# Altium PCB USBasp.PcbDoc
Units mm, origin at the board's own origin, x right, y up, seen from the top; angles counter-clockwise.
Board outline 61 x 30.6 mm, 2 copper layers (Top Layer, Bottom Layer), stack 1.671 mm thick; 34 components, 31 nets, 121 pads, 41 vias.
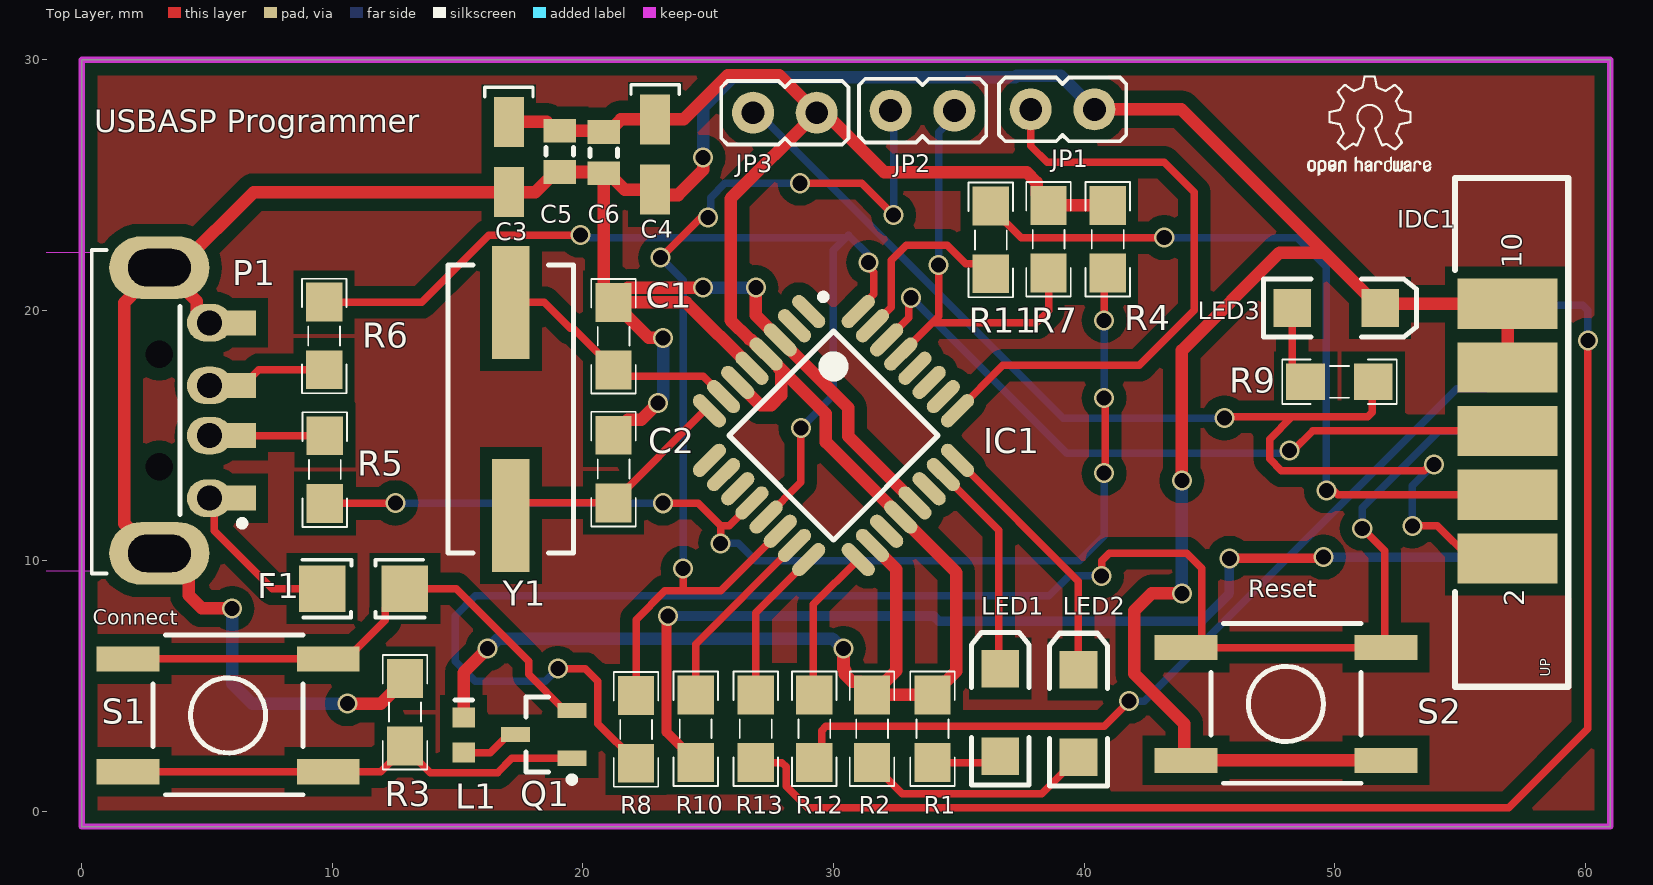
[diagram p0: Top Layer view]
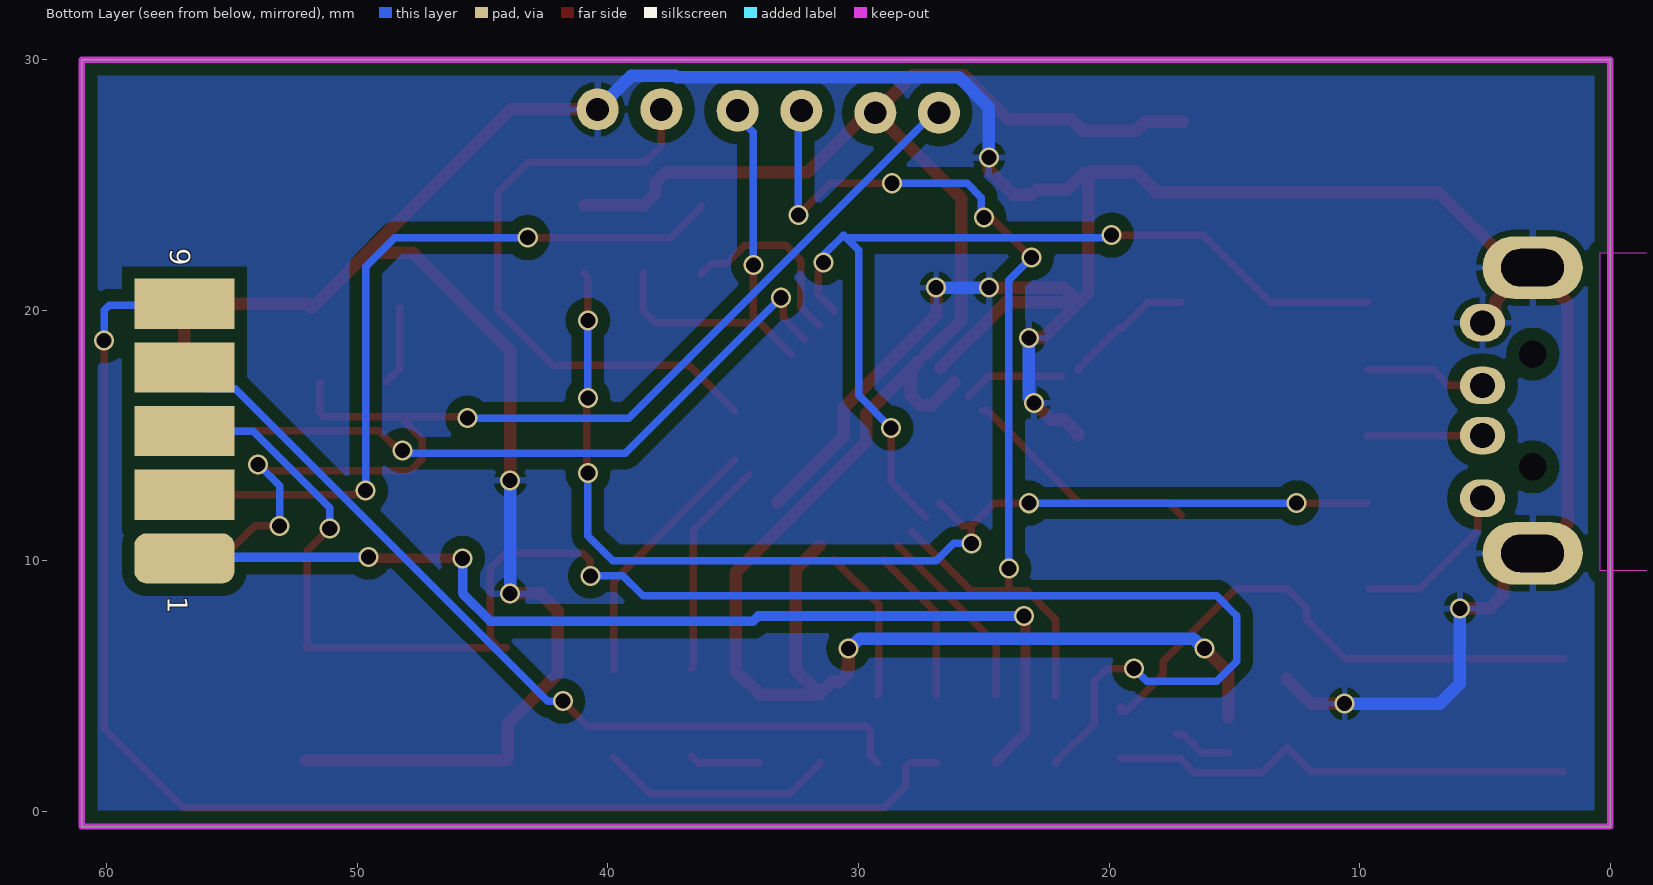
[diagram p1: Bottom Layer view, seen from below]
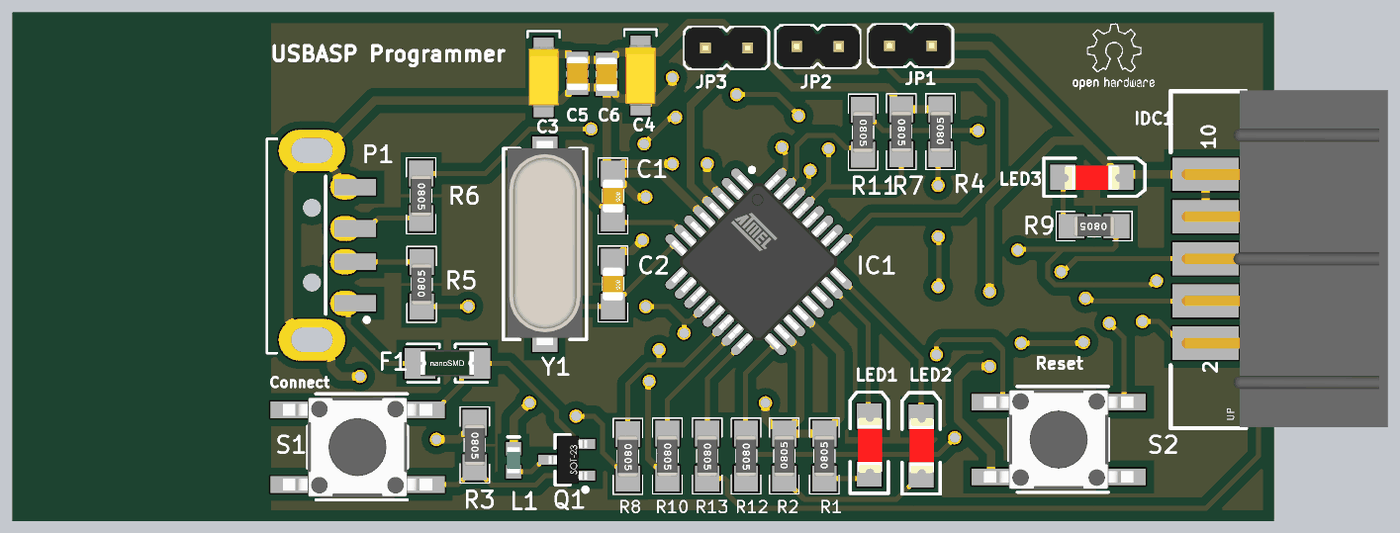
[diagram p2: 3D render of the assembled board from above, using the file's embedded part models]

## Layer stack, top to bottom
Top Solder: solder mask 0.0102, Solder Resist, Dk 3.5
Top Layer: signal copper 0.0356
Dielectric 1: dielectric 1.6, FR-4, Dk 4.8
Bottom Layer: signal copper 0.0356
Bottom Solder: solder mask 0.0102, Solder Resist, Dk 3.5

## Board outline
0,-0.6 61,-0.6 61,30 0,30

## Design rules (kind name [scope] priority, off if disabled: settings)
Clearance Clearance_Polygon [InPolygon] p1: gap=0.5 ignorepadtopadclearanceinfootprint=FALSE
Clearance [All] p2: gap=0.25 ignorepadtopadclearanceinfootprint=FALSE
HoleSize [All] p1: absolutevalues=TRUE maxlimit=5 minlimit=0.1 maxpercent=80.000 minpercent=20.000
HoleToHoleClearance [All] p1: gap=0.2 allowstackedmicrovias=TRUE
MinimumSolderMaskSliver [All] p1: minsoldermaskwidth=0.1
PolygonConnect [All] p1: connectstyle=Relief reliefconductorwidth=0.254 reliefentries=4 polygonreliefangle="90 Angle" airgapwidth=0.254
RoutingVias [All] p1: holewidth=0.6 width=0.8 viastyle="Through Hole" minholewidth=0.5 minwidth=0.7 maxholewidth=1 maxwidth=2
SilkToSilkClearance [All] p1: silktosilkclearance=0.1
SilkToSolderMaskClearance [IsPad] p1: minsilkscreentomaskgap=0.1 clearancetoexposedcopper=TRUE
SolderMaskExpansion [All] p1: expansion=0.102 istentingtop=FALSE
Width [All] p1: maxlimit=1 minlimit=0.25 preferedwidth=0.3
25 further rules are at their usual default settings.

## Components (designator, comment, footprint, x,y, rotation, side; value= is the part's Value field where it differs from the comment)
C1 "22pF" CAPC3413X12N 21.225,18.962 r270 top
C2 "22pF" CAPC3413X12N 21.225,13.662 r270 top
C3 "10uF" "CAPP 1206 (3216X18L) Size A" 17.048,27.517 r270 top
C4 "10uF" "CAPP 1206 (3216X18L) Size A" 22.882,27.617 r270 top
C5 "100nF" SMD_CAP_0805 19.082,27.167 r270 top
C6 "100nF" SMD_CAP_0805 20.84,27.117 r270 top
F1 "250mA" "1206 FUSE" 11.246,8.89 r0 top
IC1 "IC_MCU_ATmega8A_SMD" 32A_N 30,15 r315 top
IDC1 "CONNECTOR_IDC_5X2" "IDC2.54-10PIN - CROSS" 56.9,15.18 r90 top
JP1 "Jumper" JP254_V 39.141,28.016 r180 top
JP2 "Jumper" JP254_V 33.553,27.965 r0 top
JP3 "Jumper" JP254_V 28.062,27.882 r180 top
L1 "Inductor" INDC1608L 15.24,3.048 r270 top value=10uH
LED1 "1206" "LED SMD 1206" 36.652,3.95 r90 top
LED2 "Red" "LED SMD 1206" 39.776,3.912 r90 top
LED3 "Red" "LED SMD 1206" 50.061,20.091 r0 top
P1 "USB Connector" "USB A TYPE RIGHT ANGLE" 0.4,16 r180 top (schematic designator p1)
Q1 "BC807" SOT23_BEC_N 18.438,3.073 r180 top
R1 "270" RESC3413X04N 33.953,3.299 r90 top
R2 "270" RESC3413X04N 31.54,3.299 r90 top
R3 "4K7" RESC3413X04N 12.903,3.962 r270 top
R4 "2K" RESC3413X04N 40.945,22.835 r90 top
R5 "100" RESC3413X04N 9.703,13.64 r90 top
R6 "100" RESC3413X04N 9.677,18.974 r270 top
R7 "10K" RESC3413X04N 38.583,22.835 r270 top
R8 "270" RESC3413X04N 24.502,3.301 r270 top
R9 "270" RESC3413X04N 50.19,17.145 r180 top
R10 "270" RESC3413X04N 22.123,3.277 r270 top
R11 "270" RESC3413X04N 36.278,22.809 r270 top
R12 "270" RESC3413X04N 29.235,3.301 r270 top
R13 "270" RESC3413X04N 26.899,3.301 r270 top
S1 "Switch PB" SW-PB 5.842,3.835 r180 top
S2 "Switch PB" SW-PB 48.057,4.293 r180 top
Y1 "12 MHz" "CRYSTAL SMD" 17.125,16.062 r270 top

## Footprints (in the part's own frame and the unit in brackets; to place one, negate y for a bottom-side part, rotate by r counter-clockwise, add the part's x,y. Pads: shape width x height; smd on the part's side, far side on the other; paste and mask are expansions set on the pad)
32A_N [mm] "Thin QFP, 32-Leads, Body 7x7mm, Pitch 0.8mm, IPC Medium Density"
  oval 1.65x0.55 smd mask+0.06: 1(-4.2,2.8) 2(-4.2,2) 3(-4.2,1.2) 4(-4.2,0.4) 5(-4.2,-0.4) 6(-4.2,-1.2) 7(-4.2,-2) 8(-4.2,-2.8) 17(4.2,-2.8) 18(4.2,-2) 19(4.2,-1.2) 20(4.2,-0.4) 21(4.2,0.4) 22(4.2,1.2) 23(4.2,2) 24(4.2,2.8)
  oval 0.55x1.65 smd mask+0.06: 9(-2.8,-4.2) 10(-2,-4.2) 11(-1.2,-4.2) 12(-0.4,-4.2) 13(0.4,-4.2) 14(1.2,-4.2) 15(2,-4.2) 16(2.8,-4.2) 25(2.8,4.2) 26(2,4.2) 27(1.2,4.2) 28(0.4,4.2) 29(-0.4,4.2) 30(-1.2,4.2) 31(-2,4.2) 32(-2.8,4.2)
  silkscreen extent -4.32,-2.95 2.95,3.75, body extent -4.51,-4.51 4.51,4.51, height 1.15
"1206 FUSE" [mm] "Fast Acting Smd 1206 non-Resettable Fuse Chip For Pcb Board-Design:Abbas Basereh"
  rect 1.85x1.85 smd: 1(-1.65,0) 2(1.65,0)
  silkscreen extent -2.43,-1.15 2.43,1.15, body extent -1.6,-0.8 1.6,0.8, height 1
CAPC3413X12N [mm] "Chip Capacitor, 2-Leads, Body 3/40x1/30mm, IPC Medium Density-Design:Abbas Basereh"
  rect 1.55x1.45 smd: 1(-1.35,0) 2(1.35,0)
  silkscreen extent -2.29,-0.89 2.29,0.89, body extent -1,-0.62 1,0.63, height 0.78
"CAPP 1206 (3216X18L) Size A" [mm] "Chip Capacitor, 2-Leads, Body 3.2x1.6mm, IPC High Density, chip Tantalum"
  rect 1.999x1.199 smd: 1(0,0) 2(2.8,0)
  silkscreen extent -1.38,-0.97 -0.99,0.97, body extent -0.43,-0.9 3.21,0.9, height 1.8
"CRYSTAL SMD" [mm] "DESIGNER ABBAS BASEREH"
  rect 4.5x1.5 smd: 1(-4.25,0) 2(4.25,0)
  silkscreen extent -5.75,-2.5 5.75,2.5, body extent -6.21,-2.25 6.09,2.25, height 5.18
"IDC2.54-10PIN - CROSS" [mm] "Connector; IDC, Low Profile Male Header, Thru-Hole; 10 Position; Vertical; Pitch 2.54 mm; 20.32 x 9.2 x 9.45 mm (LxWxH) DESIGNER : ABBAS BASEREH"
  rrect50% 2x4 smd far side: 1(-5.08,0)
  rect 2x4 smd: 2(-5.08,0) 4(-2.54,0) 6(0,0) 8(2.54,0) 10(5.08,0)
  rect 2x4 smd far side: 3(-2.54,0) 5(0,0) 7(2.54,0) 9(5.08,0)
  silkscreen extent -10.2,-2.42 10.1,2.1, body extent -10.15,-10.97 10.15,1.43, height 4.27
INDC1608L [mm] "Chip Inductor, Body 1.6x0.8mm, IPC High Density"
  rect 0.8x0.9 smd: 1(-0.7,0) 2(0.7,0)
  silkscreen extent -1.4,-0.35 -1.4,0.35, body extent -0.8,-0.4 0.8,0.4, height 0.95
JP254_V [mil] "Jumper Header 2.54mm Pitch, Vertical"
  round 66 hole 36: 1(50,0) 2(-50,0)
  silkscreen extent -100,-50 100,50, body extent -96,-49 100,49, height 323
"LED SMD 1206" [mm]
  rect 1.5x1.5 smd: 1(-1.75,0) 2(1.75,0)
  silkscreen extent -2.9,-1.15 3.2,1.15, body extent -1.65,-0.76 1.65,0.69, height 1.36
RESC3413X04N [mm] "Chip Resistor, 2-Leads, Body 3/40x1/30mm, IPC Medium Density-Design:Abbas Basereh"
  rect 1.55x1.45 smd: 1(-1.35,0) 2(1.35,0)
  silkscreen extent -2.29,-0.89 2.29,0.89, body extent -1.25,-0.62 1.25,0.62, height 0.79
SMD_CAP_0805 [mm]
  rect 0.95x1.3 smd: 1(0,0) 2(1.65,0)
  silkscreen extent 0.67,-0.55 0.97,0.55, body extent -0.19,-0.63 1.84,0.63, height 0.65
SOT23_BEC_N [mm] "SOT23, 3-Leads, Body 2.9x1.3mm, Pitch 0.95mm, Lead Span 2.4mm, IPC Medium Density"
  rect 1.15x0.6 smd: 1(-1.125,0.95) 2(-1.125,-0.95) 3(1.125,0)
  silkscreen extent -1.25,-1.5 0.7,1.92, body extent -1.23,-1.45 1.07,1.45, height 1
SW-PB [mm]
  rect 2.5x1 smd: 1(-3.992,2.25) 1(3.992,2.25) 2(-3.992,-2.25) 2(3.992,-2.25)
  silkscreen extent -3,-3.2 3,3.18, body extent -4.5,-3 4.5,3, height 5
"USB A TYPE RIGHT ANGLE" [mm] "Connector; USB1.1, Type A, SM; 4 Position; Right Angle DESIGNER ABBAS BASEREH"
  rect 2.5x1 smd: 1(-5.3,3.5) 2(-5.3,1) 3(-5.3,-1) 4(-5.3,-3.5)
  oval 1.8x1.5 hole 1: 1(-4.7,3.5) 2(-4.7,1) 3(-4.7,-1) 4(-4.7,-3.5)
  oval 4x2.5 hole 1.5 slot 2.5 at 0 deg: 5(-2.7,-5.7) 6(-2.7,5.7)
  round 0.8 hole 1.1 unplated: MH1(-2.7,-2.25) MH2(-2.7,2.25)
  Keep-Out Layer board cut-out: 0,6.4 0,-6.3 15.3,-6.3 15.3,6.4
  silkscreen extent -6.13,-6.4 0,6.5, body extent -4.9,-6.3 15.1,6.3, height 3.45

## Part data
C1 C2: library part "CAP SMD 0805", "CAP 0805", Data=16-12-2016, Desc.="CAP SMD 0805", Designer="Abbas Basereh"
C3 C4: library part Cap-Polar, "Polar Capacitor", Voltage=16V, Adding Date=1387/12/20, Designer="Saeid Jorablo", Organazation=ControTec
C5 C6: library part Cap-Bipolar, "Bipolar Capacitor", Voltage=100V, Adding Date=1387/12/20, Designer="Saeid Jorablo", Organazation=ControTec
F1: library part "Fuse SMD1206", "SMD Fuses 1206", Data=16-12-2016, Desc.="SMD Fuses 1206", Designer="Abbas Basereh"
IC1: "8-bit AVR Microcontroller, 8KB Flash, 512 Bytes EEPROM, 1KB SRAM, 32-pin TQFP, Industrial Grade (-40°C to 85°C)", Supplier Part Number 1=ATMEGA8A-AU-ND, Voltage=(V), Category=IC_MCU, Code_JEDEC=MS-026-ABA, Company="SJ Libraries", ComponentLink1Description=Datasheet, ComponentLink1URL=http://www.alldatasheet.com/view.jsp?Searchword=, ComponentLink2Description=Reference, DatasheetVersion="revC, Jul-2009", Designer="Eng. Saeid Jorablo", HelpURL=http://s3.picofile.com/file/7443264187/Coming_Soon_logo.gif, Mounting Technology="Surface Mount\Through-Hole", PackageDescription="32-Lead, 7x7x1.0 mm Body, 0.8mm Lead Pitch, Thin Profile Plastic Quad Flat Package (TQFP)", PackageReference=32A, Published=1-Apr-2010, Publisher="Saeid UnLimited", Supplier 1=Digi-Key, Supplier 2=Farnell, Supplier 3=Mouser, Supplier Part Number 2=1748532, Supplier Part Number 3=556-ATMEGA8A-AU, TYPE=IC
IDC1: library part "IDC_5X2 HEADER", "Header, 5-Pin, Dual row", Manufacturer=CHINA, Max Current=mA, Category=Connector, ComponentLink1Description=Datasheet, ComponentLink2Description=Reference, Connector type="IDC5X2  PROGPIN", Designer="ABBAS BASEREH", LatestRevisionDate=1395-11-17, Mounting Technology=Through-Hole, Pin Count=10, Publisher="ABBAS BASEREH", Status=Unreleased, Update=2017-2-4
JP1 JP2 JP3: library part JP, "Jumper Component", Category=Jumpers, Company="SJ Libraries", ComponentLink1Description=Datasheet, ComponentLink2Description=Reference, Designer="Eng. Saeid Jorablo", HelpURL=http://s3.picofile.com/file/7443264187/Coming_Soon_logo.gif, Mounting Technology="Surface Mount\Through-Hole", Pin Count=2, Publisher="SJ Unlimited", Status=Unreleased
LED1: library part LED, "LED", Color=Red, Adding Date=1387/12/22, Designer="Saeid Jorablo", Organazation=ControTec, Size="SMD 1206"
LED2 LED3: library part LED, "LED", Adding Date=1387/12/22, Color=Red, Designer="Saeid Jorablo", Organazation=ControTec, Size="SMD 1206"
P1: library part "USB A CONNECTOR", "USB Connector-A Type", Max Current=600mA, Category=Connector, ComponentLink1Description=Datasheet, ComponentLink2Description=Reference, Designer="ABBAS BASEREH", Mounting Technology="Surface Mount\Through-Hole", Pin Count=4-6, Publisher="ABBAS BASEREH", Status=Unreleased, Update=1395-11-17
Q1: library part PNP, "PNP Bipolar Transistor", LatestRevisionDate=29-May-2009, LatestRevisionNote="IPC-7351 Footprint Added.", PackageDescription="3-Pin SOT-23 Package 0.95 mm Pitch, 2.4 mm Lead Span", PackageReference=SOT-23B, PackageVersion=Aug-1999, Published=8-Jun-2000, Publisher="Altium Limited"
R1 R2 R3 R4 R5 R6 R7 R8 R9 R10 R11 R12 R13: library part "RES 0805 0.125W", "RES 0805", Data=16-12-2016, Desc.="RES SMD 0805", Designer="Abbas Basereh"
S1 S2: "Push Button Switch"
Y1: library part XTAL_Crystal, "XTAL Crystal", ComponentLink1Description=Datasheet, ComponentLink2Description=Reference, Design Date=2017-1-3, Designer="ABBAS BASEREH", Mounting Technology="Surface Mount\Through-Hole", Status=Unreleased
L1: Code_IEC=1005, Code_JEITA=0402, LatestRevisionDate=29-May-2009, LatestRevisionNote="IPC-7351 Footprint Added.", PackageDescription="Chip Inductor", PackageReference=0402-A, Published=8-Jun-2000, Publisher="Altium Limited"

## Via types
v1: diameter 0.8, hole 0.6, Top Layer to Bottom Layer, 41 vias

## Nets (pads, with @x,y where several pads share a name; then routed paths per layer and width w, separated by ;. In a path a pad name is that pad's centre, name@x,y a point inside that pad or via, vN(x,y) a via of type N, cw(c..) or ccw(c..) an arc to the next point about the centre after c; other vN are vias at no path point)
+5: C3.1 C4.1 C5.1 C6.1 IC1.4 IC1.6 IC1.18 IC1.20 JP3.2 L1.1 R1.2 R2.2 R4.2 R7.1 | length 88.5
  Top Layer w0.5: L1.1 15.24,5.54 v1(16.2,6.5) ; C3.1 18.557,27.517 18.907,27.167 C5.1 21.065,27.167 21.515,27.617 C4.1 24.017,27.617 25.773,29.373 27.841,29.373 JP3.2 JP3.2@29.3,27.851 ; IC1.6 27.094,16.209 27.509,16.209 27.911,16.611 27.911,17.587 IC1.4@27.811,17.687 ; IC1.4 27.299,18.253 26.886,18.667 26.864,18.667 26.679,18.851 26.647,18.851 25.9,19.598 25.9,24.451 JP3.2@29.3,27.851 ; IC1.4@27.63,17.936 29.7,15.866 29.7,14.734 IC1.20 34.9,9.534 34.9,5.596 34.478,5.174 34.428,5.174 33.953,4.699 R1.2 R2.2 R2.2@31.54,4.699 ; v1(30.4,6.5) 30.4,5.694 30.46,5.634 30.46,5.466 30.753,5.174 31.065,5.174 R2.2@31.54,4.699 ; IC1.18 32.5,9.672 32.5,5.609 32.065,5.174 32.015,5.174 R2.2@31.54,4.699 ; R4.2 R7.1 38.108,24.66 38.108,25.107 37.715,25.5 32.031,25.5 29.681,27.851 JP3.2@29.3,27.851
  Bottom Layer w0.5: v1(16.2,6.5) 16.243,6.5 16.643,6.9 29.957,6.9 30.357,6.5 v1(30.4,6.5)
GND: C1.1 C2.1 C3.2 C4.2 C5.2 C6.2 IC1.3 IC1.5 IC1.21 IDC1.8 IDC1.10 JP1.2 LED3.2 P1.4 P1.5 P1.6 R3.1 S2.1 | length 167.6
  Top Layer w0.5: P1.4@5.7,19.5 5.1,19.5 4.95,19.5 4.6,19.85 4.6,20.355 P1.5@3.255,21.7 ; v1(6,8.1) 4.8,8.1 4.271,8.629 4.271,9.284 3.255,10.3 P1.6 2.891,10.3 1.7,11.491 1.7,20.3 1.967,20.567 1.967,20.776 2.891,21.7 P1.5@3.255,21.7 ; v1(10.6,4.3) 11.941,4.3 12.903,5.262 R3.1 ; C2.1 21.225,15.062 21.8,15.637 22.337,15.637 v1(23,16.3) ; v1(23.2,18.9) 22.637,18.9 20.84,20.698 C6.2 ; v1(24.8,20.9) 21.8,20.9 21.225,20.325 C1.1 24.122,20.312 IC1.5 ; v1(24.8,26.1) 24.8,25.6 23.8,24.6 23.1,24.6 C4.2 21.664,24.817 21.015,25.467 C6.2 ; v1(26.9,20.9) 26.9,19.8 27.879,18.821 IC1.3 30.583,16.114 30.583,14.983 IC1.21 ; JP1.2 43.886,28.016 49.602,22.3 ; v1(43.9,8.7) 42.7,8.7 42,8 42,5.5 44,3.5 44,2.107 44.064,2.043 S2.1@52.049,2.043 ; v1(43.9,13.2) 43.9,18.4 47.8,22.3 49.602,22.3 ; IDC1.8 IDC1.10 51.979,20.26 LED3.2 49.602,22.3 ; P1.5@3.255,21.7 3.85,21.7 6.867,24.717 C3.2 18.108,24.717 18.907,25.517 C5.2 20.79,25.517 C6.2
  Bottom Layer w0.5: v1(6,8.1) 6,5.1 6.8,4.3 v1(10.6,4.3) ; v1(23,16.3) 23.2,16.5 v1(23.2,18.9) ; v1(24.8,20.9) v1(26.9,20.9) ; v1(24.8,26.1) 24.8,28.1 26,29.3 31.726,29.3 31.729,29.304 32.838,29.304 32.841,29.3 34.266,29.3 34.269,29.304 35.378,29.304 35.381,29.3 37.263,29.3 37.317,29.354 39.073,29.354 JP1.2 ; v1(43.9,8.7) 43.9,9.8 ; 43.9,9.8 v1(43.9,13.2)
NetF1_1: F1.1 P1.1 | length 6.7
  Top Layer w0.3: P1.1@5.7,12.5 5.65,12.5 5.3,12.15 5.3,11.2 7.61,8.89 F1.1
NetF1_2: F1.2 Q1.2 S1.2 | length 21.7
  Top Layer w0.3: S1.2@1.85,6.085 9.834,6.085 10.584,6.085 12.121,7.622 12.121,8.115 F1.2 14.941,8.89 17.835,5.997 17.835,5.477 19.288,4.023 Q1.2 19.563,4.111 Q1.2@19.5,4.173
NetIC1_23: IC1.23 LED1.2 | length 8.7
  Top Layer w0.3: IC1.23 36.6,11.228 36.6,5.753 LED1.2
NetIC1_24: IC1.24 LED2.2 | length 10.3
  Top Layer w0.3: IC1.24 39.776,9.183 LED2.2
NetIC1_25: IC1.25 JP1.1 | length 24.6
  Top Layer w0.3: IC1.25 36.76,17.8 42.2,17.8 44.4,20 44.4,24.7 43.2,25.9 38.527,25.9 37.871,26.555 JP1.1
NetIDC1_1: IDC1.1 R8.2 | length 41.8
  Top Layer w0.381: v1(23.4,7.8) 23.336,7.736 23.336,3.167 24.502,2.001 R8.2 ; v1(45.8,10.1) 49.5,10.1 v1(49.55,10.15)
  Bottom Layer w0.381: v1(23.4,7.8) 33.997,7.8 34.207,7.59 44.69,7.59 45.8,8.7 v1(45.8,10.1) ; v1(49.55,10.15) 56.85,10.15 IDC1.1
NetIDC1_2: IDC1.2 JP3.1 R9.1 | length 47.1
  Top Layer w0.3: v1(45.6,15.7) 45.646,15.746 48.296,15.746 ; R9.1@51.459,17.105 51.5,17.064 51.5,15.926 51.324,15.75 48.907,15.75 48.903,15.746 48.296,15.746 ; v1(53.1,11.4) 54.1,11.4 55.4,10.1 IDC1.2 ; v1(53.955,13.845) 53.819,13.845 53.574,13.6 47.869,13.6 47.4,14.069 47.4,14.85 48.296,15.746
  Bottom Layer w0.3: JP3.1 26.986,27.882 39.169,15.7 v1(45.6,15.7) ; v1(53.1,11.4) 53.1,12.991 v1(53.955,13.845)
NetIDC1_4: IDC1.4 R11.1 | length 30.7
  Top Layer w0.3: R11.1 36.278,24.109 37.488,22.9 v1(43.2,22.9) ; v1(49.669,12.8) 49.958,12.8 50.118,12.64 IDC1.4
  Bottom Layer w0.3: v1(43.2,22.9) 48.5,22.9 49.669,21.731 v1(49.669,12.8)
NetIDC1_5: IDC1.5 R10.2 S2.2 | length 67.9
  Top Layer w0.3: v1(19,5.7) 20.1,5.7 20.6,5.2 20.6,3.5 22.123,1.977 R10.2 ; v1(40.7,9.4) v1(40.7,9.4) 40.701,10.001 41,10.3 44.1,10.3 44.7,9.7 44.7,6.893 S2.2@44.35,6.543 ; S2.2@44.064,6.543 S2.2@44.35,6.543 ; v1(51.1,11.3) 52,10.4 52,6.592 52.049,6.543 S2.2@44.35,6.543
  Bottom Layer w0.3: v1(19,5.7) 18.5,5.2 15.7,5.2 14.9,6 14.9,7.8 15.7,8.6 38.6,8.6 39.4,9.4 v1(40.7,9.4) ; v1(51.1,11.3) 51.1,12.122 54.158,15.18 IDC1.5
NetIDC1_7: IDC1.7 R12.2 | length 34.8
  Top Layer w0.3: R12.2 29.524,2.24 29.524,3.224 29.7,3.4 40.8,3.4 v1(41.8,4.4)
  Bottom Layer w0.3: v1(41.8,4.4) 41.801,4.401 42.401,4.401 54.87,16.87 56.05,16.87 IDC1.7
NetIDC1_9: IDC1.9 R13.2 | length 55.7
  Top Layer w0.3: R13.2 27.935,1.951 28.11,1.776 28.11,1.011 28.971,0.15 56.95,0.15 60.1,3.3 v1(60.1,18.8)
  Bottom Layer w0.3: IDC1.9 56.96,20.2 59.9,20.2 60.1,20 v1(60.1,18.8)
NetL1_2: L1.2 Q1.3 | length 2.4
  Top Layer w0.3: L1.2 16.312,2.348 17.038,3.073 Q1.3
NetLED1_1: LED1.1 R1.1 | length 2.8
  Top Layer w0.3: R1.1 36.4,1.949 LED1.1
NetLED2_1: LED2.1 R2.1 | length 9.4
  Top Layer w0.3: R2.1 31.54,1.899 32.738,0.7 38.315,0.7 LED2.1
NetLED3_1: LED3.1 R9.2 | length 3.2
  Top Layer w0.3: LED3.1 48.311,17.675 R9.2
NetP1_2: P1.2 R5.2 | length 4
  Top Layer w0.3: P1.2@5.7,15 5.71,14.99 R5.2
NetP1_3: P1.3 R6.2 | length 4.2
  Top Layer w0.3: P1.3@5.7,17 6.45,17 7.074,17.624 R6.2
NetQ1_1: Q1.1 R3.2 S1.1 | length 18.8
  Top Layer w0.3: S1.1@1.85,1.585 9.834,1.585 11.926,1.585 12.903,2.562 13.918,1.548 16.593,1.548 17.169,2.123 Q1.1
PB0: IC1.12 R4.1 R5.1 | length 45.2
  Top Layer w0.3: R5.1 12.49,12.29 v1(12.517,12.317) ; v1(23.2,12.3) 24.6,12.3 25.5,11.4 ; v1(25.5,10.7) 25.5,11.4 ; IC1.12@26.747,12.245 IC1.12 25.834,11.4 25.5,11.4 ; v1(40.8,13.5) 40.8,13.6 40.839,13.639 40.839,16.461 v1(40.8,16.5) ; v1(40.8,19.6) 40.8,21.34 R4.1
  Bottom Layer w0.3: v1(12.517,12.317) 12.526,12.309 23.191,12.309 v1(23.2,12.3) ; v1(25.5,10.7) 26.2,10.7 26.9,10 39.8,10 40.8,11 v1(40.8,13.5) ; v1(40.8,16.5) v1(40.8,19.6)
PB1: IC1.13 IC1.32 R6.1 | length 38.5
  Top Layer w0.3: R6.1 13.572,20.324 16.248,23 v1(19.9,23) ; IC1.13 28.7,13.134 v1(28.7,15.3) ; IC1.32 30.99,20.017 31.61,20.638 31.61,21.525 31.4,21.736 v1(31.4,21.902)
  Bottom Layer w0.3: v1(19.9,23) 20,22.9 30.5,22.9 30.6,23 ; v1(28.7,15.3) 30,16.6 30,22.4 30.6,23 ; v1(31.4,21.902) 31.4,22.2 30.6,23
PB2: IC1.14 JP2.2 R10.1 | length 39.6
  Top Layer w0.3: R10.1 22.123,7.655 23.269,8.8 24,8.8 ; v1(23.1,22.1) 24.7,23.7 v1(25,23.7) ; v1(24,9.7) 24,8.8 ; IC1.14 25.497,8.8 24,8.8 ; v1(28.669,25.069) 31.131,25.069 v1(32.4,23.8)
  Bottom Layer w0.3: v1(23.1,22.1) 24,21.2 v1(24,9.7) ; v1(25,23.7) 25.096,23.796 25.096,24.496 25.669,25.069 v1(28.669,25.069) ; JP2.2 32.4,27.849 v1(32.4,23.8)
PB3: IC1.15 R8.1 | length 7.6
  Top Layer w0.3: R8.1 24.502,6.674 IC1.15
PB4: IC1.16 R13.1 | length 6.3
  Top Layer w0.3: R13.1 26.899,7.939 IC1.16
PB5: IC1.17 R12.1 | length 6.2
  Top Layer w0.3: R12.1 29.2,4.687 29.2,8.26 IC1.17
PB6: C1.2 IC1.7 Y1.1 | length 9.3
  Top Layer w0.3: Y1.1 18.457,20.312 19.494,19.274 19.613,19.274 21.225,17.662 C1.2 ; C1.2@21.9,17.369 24.803,17.369 IC1.7
PB7: C2.2 IC1.8 Y1.2 | length 9.7
  Top Layer w0.3: Y1.2 17.625,12.312 C2.2 21.225,12.362 24.87,16.007 25.033,16.007 IC1.8
RST: IC1.29 JP2.1 R7.2 | length 17.1
  Top Layer w0.3: IC1.29 33.717,19.283 33.934,19.5 38.1,19.5 38.583,19.983 R7.2 ; 33.9,19.469 34.2,19.769 v1(34.2,21.8)
  Bottom Layer w0.3: v1@34.2,21.7 34.2,27.101 34.823,27.725 JP2.1
RX: IC1.30 IDC1.6 | length 28.9
  Top Layer w0.3: IC1.30 32.121,18.821 33.004,19.704 33.004,20.404 v1(33.1,20.5) ; v1(48.2,14.4) 48.335,14.4 49.135,15.2 56.88,15.2 IDC1.6
  Bottom Layer w0.3: v1@33.03,20.57 39.3,14.3 48.1,14.3 v1(48.2,14.4)
TX: IC1.31 R11.2 | length 7.6
  Top Layer w0.3: IC1.31 32.3,20.128 32.3,22 32.9,22.6 34.531,22.6 35.279,21.852 35.885,21.852 R11.2
pads on no net: IC1.1 IC1.2 IC1.9 IC1.10 IC1.11 IC1.19 IC1.22 IC1.26 IC1.27 IC1.28 IDC1.3 P1.MH1 P1.MH2

## Polygon pours and split planes (outlines as drawn)
no net on Top Layer "NONET_L01_P000" (solid, pour order 0): 0,-0.6 0,30 61,30 61,-0.6 0.4,-0.6 0.3,-0.5 0.2,-0.6
GND on Bottom Layer "GND_L02_P001" (solid, remove dead copper, pour order 1): 0,-0.6 -0.2,-0.4 -0.2,29.9 -0.1,29.9 0,30 61,30 60.9,29.9 60.9,-0.5 61,-0.6

## Keep-outs
Keep-Out Layer:
  the board outline again, w0.254

## Silkscreen, mask and mechanical layers (free items; w line width, h text height)
Top Overlay:
  drawing of 13 lines, arcs and shapes, not listed
  text "USBASP Programmer" at 0.5,27.1 h0.9
  text "Reset" at 46.55,8.55 h0.7
  text "Connect" at 0.45,7.45 h0.6

## Text inside footprints (layer, text, board x,y; h text height)
IDC1: Top Overlay "UP" at 58.6,5.38 h0.4 r90; Top Overlay "10" at 57.47,21.68 h0.8 r90; Top Overlay "2" at 57.57,8.18 h0.8 r90; Bottom Overlay "9" at 57.47,22.48 h0.8 r90; Bottom Overlay "1" at 57.57,8.58 h0.8 r90; Mechanical 13 "SOCKET PLACE" at 63.5,12.78 h0.4 r90; Mechanical 13 "PCB EDGE" at 58.77,5.58 h0.4 r90
P1: Mechanical 1 "PCB Edge" at -0.073,21.173 h0.25 r270